# Allegro board SDHCalDIF_old.brd
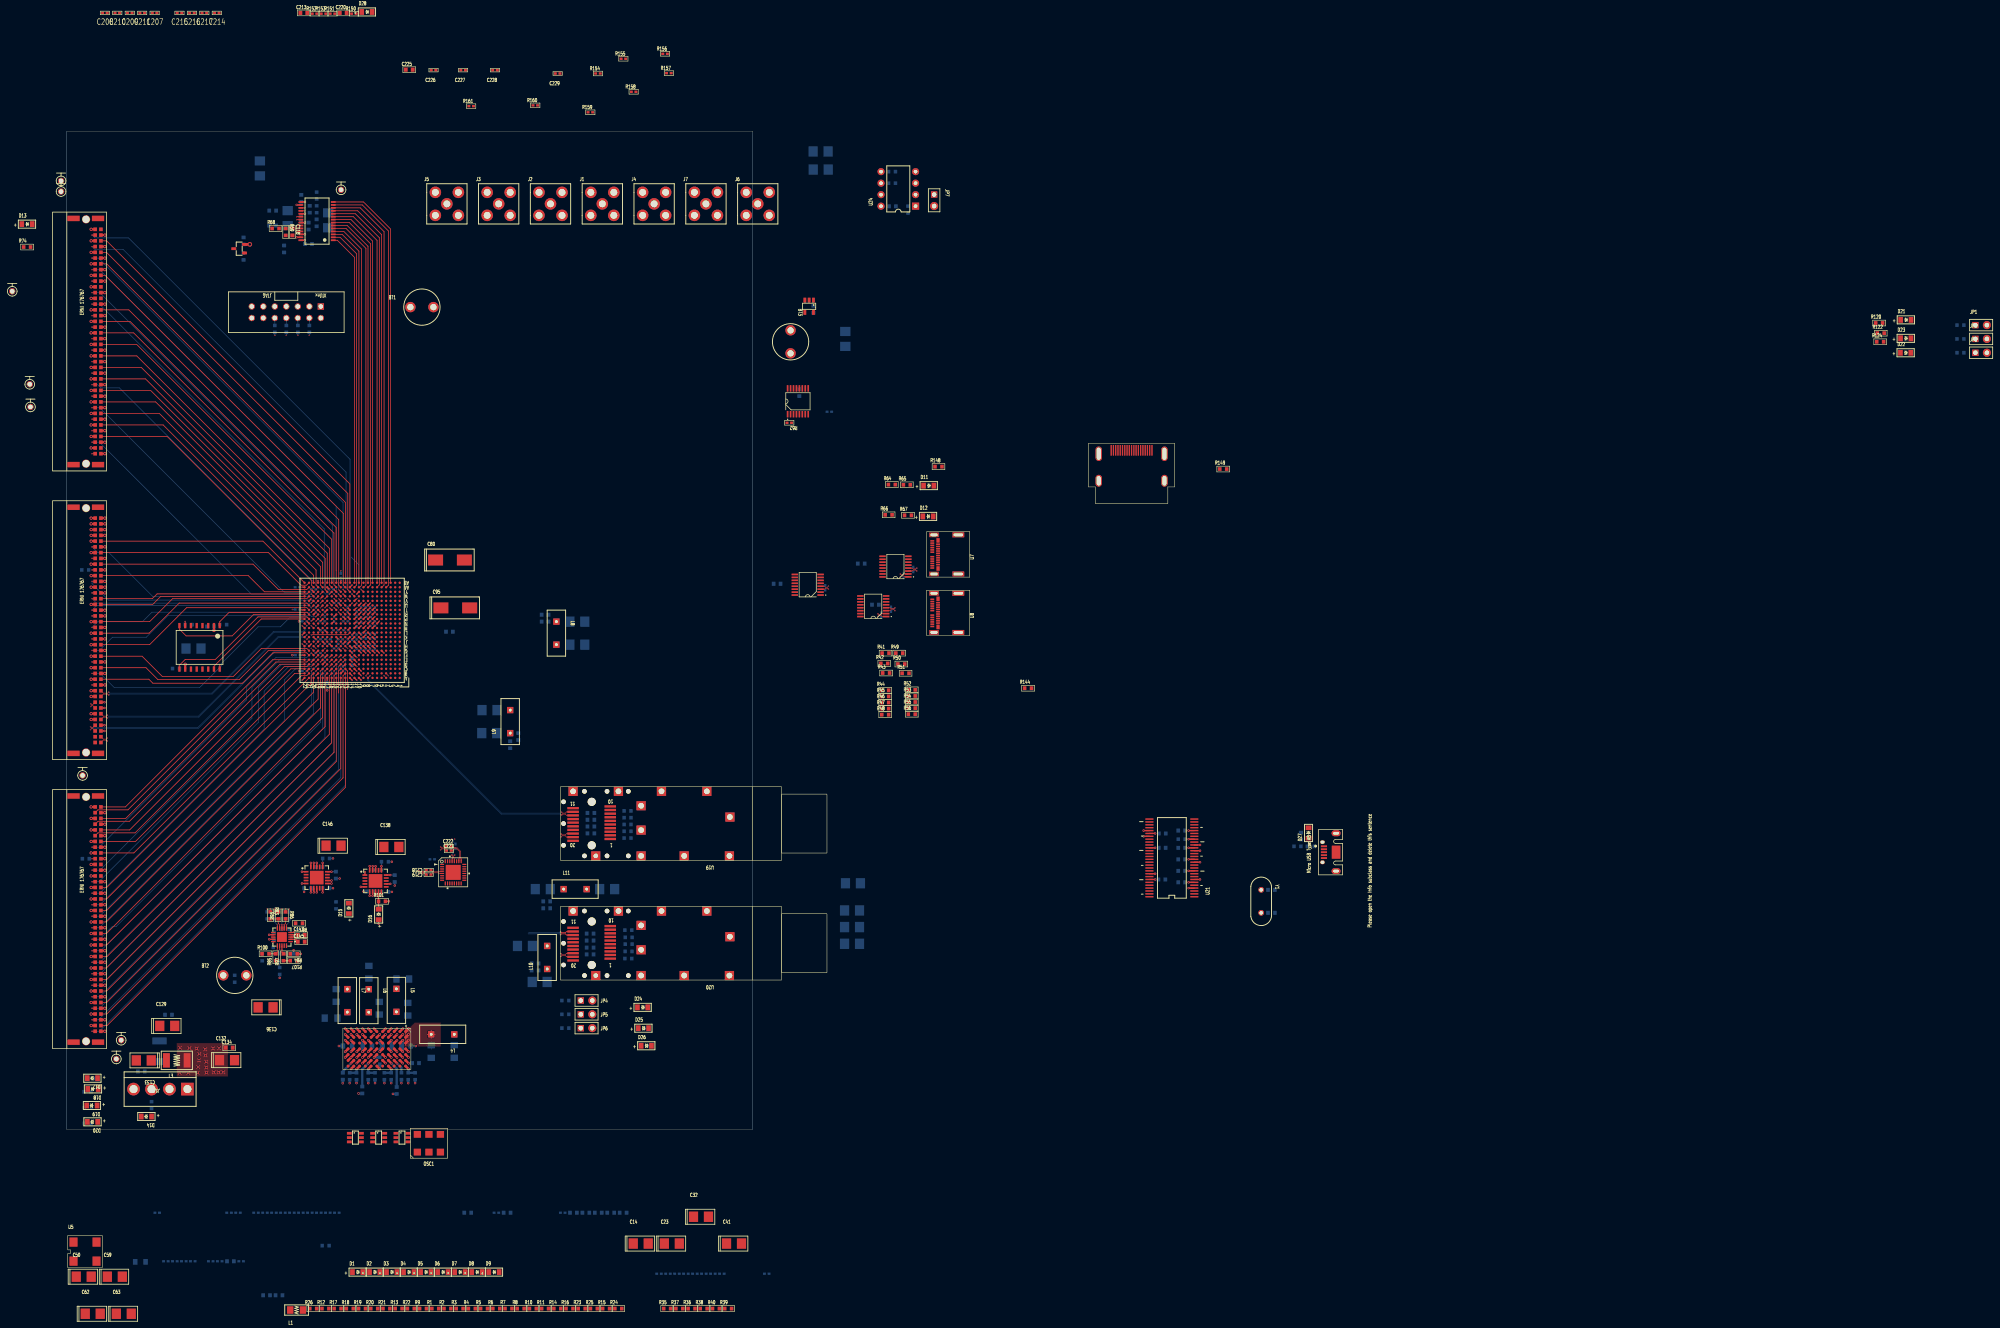
[diagram p0: board, top side]
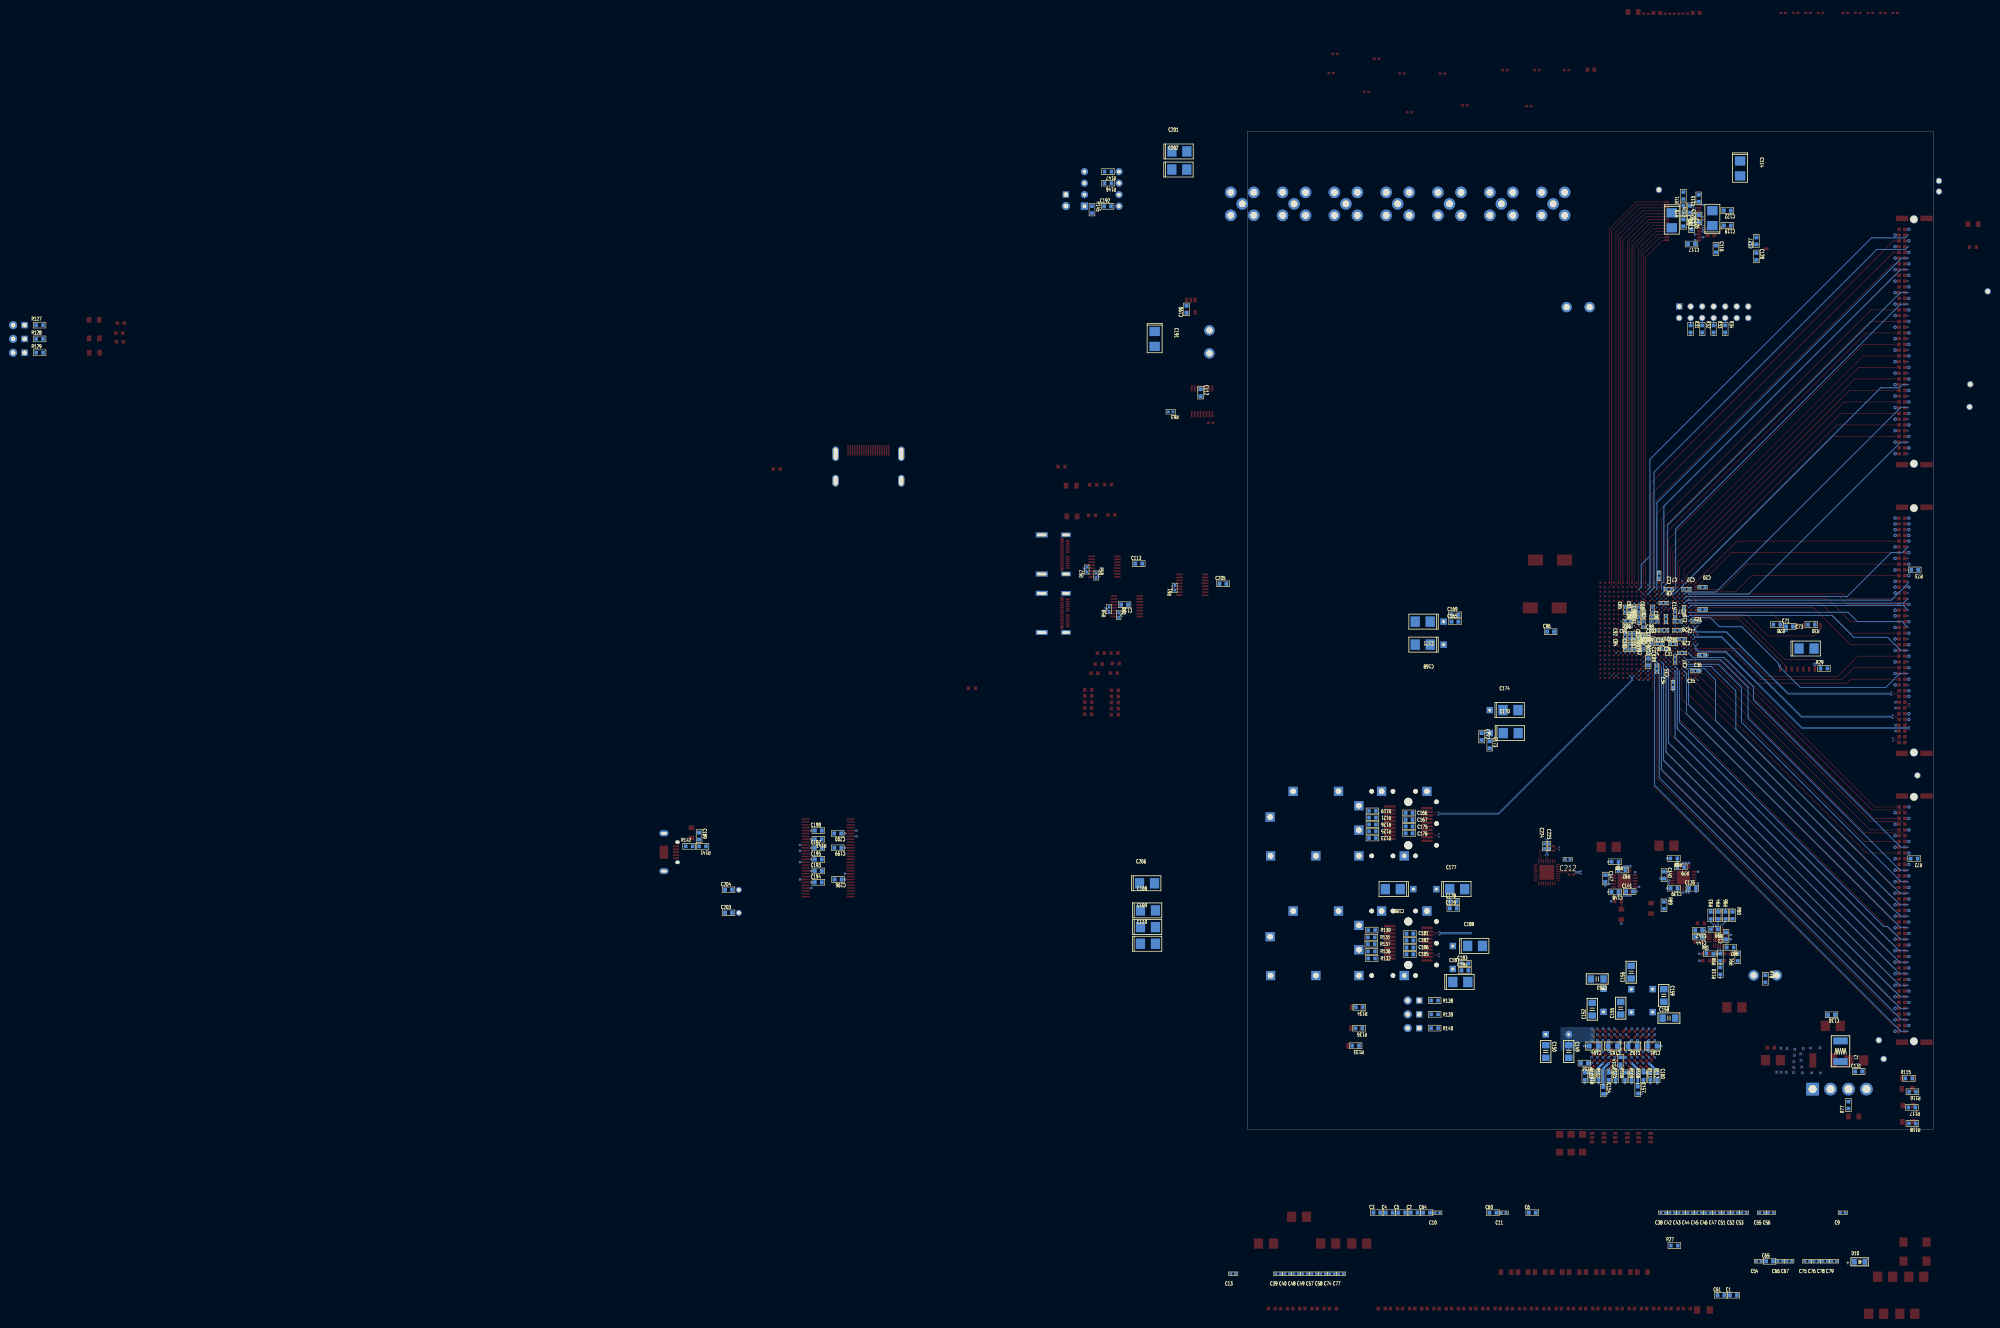
[diagram p1: board, bottom side, seen from below]

Outline 151.28 x 220.4 mm; copper layers: TOP, GND1, POWER1, SIG1, GND2, POWER2, SIG2, POWER3, GND3, BOTTOM. Coordinates in mm from the lower left corner of the outline.
Outline path: 0,220.4 0,0 151.28,0 151.28,220.4 0,220.4

## Design rules (mm)
net group CDRIN: nets CDRINN CDRINP
net group CK_5: nets CK_5N CK_5P
net group CK_40: nets CK_40N CK_40P
net group CLKOUT: nets CDRCLKOUTN CDRCLKOUTP
net group DATAOUT: nets CDRDATAOUTN CDRDATAOUTP
net group DP5: nets XTALIN XTALOUT
net group DTCC_CLK1IN_DIFF: nets DTCC_CLK1IN_N DTCC_CLK1IN_P
net group DTCC_CLK1OUT_DIFF: nets DTCC_CLK1OUT_N DTCC_CLK1OUT_P
net group DTCC_CLK2IN_DIFF: nets DTCC_CLK2IN_N DTCC_CLK2IN_P
net group DTCC_CLK2OUT_DIFF: nets DTCC_CLK2OUT_N DTCC_CLK2OUT_P
net group DTCC_CONTROL1IN_DIFF: nets DTCC_CONTROL1IN_N DTCC_CONTROL1IN_P
net group DTCC_CONTROL2IN_DIFF: nets DTCC_CONTROL2IN_N DTCC_CONTROL2IN_P
net group DTCC_DATA1OUT_DIFF: nets DTCC_DATA1OUT_N DTCC_DATA1OUT_P
net group DTCC_DATA2OUT_DIFF: nets DTCC_DATA2OUT_N DTCC_DATA2OUT_P
net group ELINKCLKIN_DIFF: nets ELINKCLKIN_N ELINKCLKIN_P
net group ELINKDATAIN_DIFF: nets ELINKDATAIN_N ELINKDATAIN_P
net group ELINKDATAOUT_DIFF: nets ELINKDATAOUT_N ELINKDATAOUT_P
net group PLUG1_DATAOUT_DIFF: nets PLUG1_DATAOUT_N PLUG1_DATAOUT_P
net group PLUG2_DATAIN_DIFF: nets PLUG2_DATAIN_N PLUG2_DATAIN_P
net group RAZ_CHN: nets RAZ_CHNN RAZ_CHNP
net group REGULARIO_SFP_RX: nets REGULARIO_SFP_RX+ REGULARIO_SFP_RX-
net group REGULARIO_SFP_TX: nets REGULARIO_SFP_TX+ REGULARIO_SFP_TX-
net group RX_CDR_CLK: nets RX_CDR_CLKN RX_CDR_CLKP
net group RX_CDR_RX: nets RX_CDR_RXN RX_CDR_RXP
net group SFP_CLK: nets SFP_CLK_N SFP_CLK_P
net group SFP_RX: nets SFP_RX+ SFP_RX-
net group SFP_TX: nets SFP_TX+ SFP_TX-
net group SPARE_LVDS: nets SPARE_LVDS_N SPARE_LVDS_P
net group USB_DATA: nets D+ D-
net group VAL_EVT: nets VAL_EVTN VAL_EVTP

## Placement (name value [footprint] x y rotation side)
BT1  Button  [INDC2-200-M]  78.34 181.55 0 top
BT2  Button  [INDC2-200-M]  37.06 34.03 0 top
BT3  Button  [INDC2-200-M]  159.67 173.89 270 top
C1  100n  [SC0603]  44.07 -36.59 180 bottom
C2  100n  [SC0603]  114.5 -18.38 180 bottom
C3  100n  [SC0603]  122.73 -18.38 180 bottom
C4  100n  [SC0603]  119.99 -18.38 180 bottom
C5  100n  [SC0603]  117.25 -18.38 180 bottom
C6  100n  [SC0603]  88.44 -18.38 180 bottom
C7  470n  [SC0402]  58.32 119.27 0 bottom
C8  470n  [SC0402]  59.49 116.22 0 bottom
C9  470n  [SC0402]  19.94 -18.38 180 bottom
C10  470n  [SC0402]  109.4 -18.38 180 bottom
C11  470n  [SC0402]  94.77 -18.38 180 bottom
C12  4.7u  [SC0402]  60.44 122.24 90 bottom
C13  4.7u  [SC0402]  154.41 -31.84 180 bottom
C14  100u  [STC3528]  126.62 -25.18 0 top
C15  470n  [SC0402]  54.95 114.71 270 bottom
C16  470n  [SC0402]  59.33 110.2 180 bottom
C17  470n  [SC0402]  56.39 112.18 0 bottom
C18  470n  [SC0402]  58.97 112.65 270 bottom
C19  470n  [SC0402]  56.93 113.74 90 bottom
C20  470n  [SC0402]  50.88 119.7 0 bottom
C21  4.7u  [SC0402]  50.88 114.8 180 bottom
C22  4.7u  [SC0402]  54.42 119.24 0 bottom
C23  100u  [STC3528]  133.48 -25.18 0 top
C24  470n  [SC0402]  60.38 107.2 180 bottom
C25  470n  [SC0402]  59.46 106.18 0 bottom
C26  470n  [SC0402]  57.66 108.22 180 bottom
C27  470n  [SC0402]  52.43 112.18 180 bottom
C28  470n  [SC0402]  55.47 108.22 0 bottom
C29  470n  [SC0402]  55.42 105.19 0 bottom
C30  4.7u  [SC0402]  56.45 110.2 180 bottom
C31  4.7u  [SC0402]  57.41 107.2 180 bottom
C32  100u  [STC3528]  139.9 -19.27 0 top
C33  470n  [SC0402]  60.95 101.75 90 bottom
C34  470n  [SC0402]  57.43 98.15 270 bottom
C35  470n  [SC0402]  52.45 101.18 180 bottom
C36  470n  [SC0402]  50.95 104.71 180 bottom
C37  470n  [SC0402]  56.93 103.76 90 bottom
C38  470n  [SC0402]  59.56 -18.38 180 bottom
C39  4.7u  [SC0402]  144.51 -31.84 180 bottom
C40  4.7u  [SC0402]  142.53 -31.84 180 bottom
C41  100u  [STC3528]  147.19 -25.18 0 top
C42  470n  [SC0402]  57.58 -18.38 180 bottom
C43  470n  [SC0402]  55.6 -18.38 180 bottom
C44  470n  [SC0402]  53.62 -18.38 180 bottom
C45  470n  [SC0402]  51.64 -18.38 180 bottom
C46  470n  [SC0402]  49.66 -18.38 180 bottom
C47  470n  [SC0402]  47.68 -18.38 180 bottom
C48  4.7u  [SC0402]  140.55 -31.84 180 bottom
C49  4.7u  [SC0402]  138.57 -31.84 180 bottom
C50  100u  [STC3528]  3.73 -32.5 0 top
C51  470n  [SC0402]  45.69 -18.38 180 bottom
C52  470n  [SC0402]  43.71 -18.38 180 bottom
C53  470n  [SC0402]  41.73 -18.38 180 bottom
C54  470n  [SC0402]  38.46 -29.1 180 bottom
C55  470n  [SC0402]  37.77 -18.38 180 bottom
C56  470n  [SC0402]  35.79 -18.38 180 bottom
C57  4.7u  [SC0402]  136.58 -31.84 180 bottom
C58  4.7u  [SC0402]  134.6 -31.84 180 bottom
C59  100u  [STC3528]  10.59 -32.5 0 top
C60  100n  [SC0603]  97.13 -18.38 180 bottom
C61  1u  [SC0603]  46.81 -36.59 180 bottom
C62  10u  [STC3528]  5.71 -40.68 0 top
C63  10u  [STC3528]  12.57 -40.68 0 top
C64  100n  [SC0603]  111.76 -18.38 180 bottom
C65  10n  [SC0603]  36.09 -29.1 180 bottom
C66  100n  [SC0402]  33.73 -29.1 180 bottom
C67  100n  [SC0402]  31.75 -29.1 180 bottom
C68  470n  [SC0402]  61.94 114.78 270 bottom
C69  47u  [SC0603]  62.88 103.23 270 bottom
C70  100n  [SC0402]  65.95 108.86 90 bottom
C71  100n  [SC0603]  31.7 111.04 180 bottom
C72  470n  [SC0402]  64.96 108.86 90 bottom
C73  10u  [STC3528]  27.94 106.17 180 bottom
C74  4.7u  [SC0402]  132.62 -31.84 180 bottom
C75  100n  [SC0402]  27.79 -29.1 180 bottom
C76  100n  [SC0402]  25.81 -29.1 180 bottom
C77  4.7u  [SC0402]  130.64 -31.84 180 bottom
C78  100n  [SC0402]  23.83 -29.1 180 bottom
C79  100n  [SC0402]  21.84 -29.1 180 bottom
C80  300u  [STC7343]  84.53 125.71 0 top
C81  4.7u  [SC0402]  64.95 114.81 270 bottom
C82  4.7u  [SC0402]  66.93 108.86 90 bottom
C83  4.7u  [SC0402]  62.95 108.64 270 bottom
C84  4.7u  [SC0402]  67.93 106.56 270 bottom
C85  4.7u  [SC0402]  66.94 114.77 270 bottom
C86  4.7u  [SC0402]  66.53 113.17 180 bottom
C87  470n  [SC0402]  65.93 114.81 90 bottom
C88  470n  [SC0402]  67.96 114.76 90 bottom
C89  470n  [SC0402]  64.94 112.52 270 bottom
C90  470n  [SC0402]  67.41 112.2 180 bottom
C91  470n  [SC0402]  67.44 111.21 0 bottom
C92  470n  [SC0402]  67.96 108.84 270 bottom
C93  470n  [SC0402]  63.92 111.56 270 bottom
C94  470n  [SC0402]  66.92 106.58 90 bottom
C95  100u  [STC7343]  85.7 115.15 0 top
C96  100u  [SC0603]  84.4 109.89 180 bottom
C97  4.7u  [SC0402]  62.93 105.85 270 bottom
C98  4.7u  [SC0402]  61.53 113.17 180 bottom
C99  4.7u  [SC0402]  61.59 110.21 180 bottom
C100  470n  [SC0402]  63.92 108.71 270 bottom
C101  470n  [SC0402]  60.35 108.19 180 bottom
C102  470n  [SC0402]  61.49 112.18 180 bottom
C103  470n  [SC0402]  63.94 113.82 270 bottom
C104  470n  [SC0402]  61.96 107.75 270 bottom
C105  470n  [SC0402]  65.93 106.58 270 bottom
C106  470n  [SC0402]  64.93 106.58 90 bottom
C107  470n  [SC0402]  63.95 106.63 270 bottom
C108  10u  [STC3528]  173.23 48.36 180 bottom
C109  10u  [STC3528]  173.23 44.68 180 bottom
C110  10u  [STC3528]  173.23 41 180 bottom
C111  100n  [SC0603]  178.38 115.85 0 bottom
C112  100n  [SC0603]  161.59 162.66 270 bottom
C113  100n  [SC0603]  175.26 124.92 180 bottom
C114  10u  [STC3528]  42.6 212.17 270 bottom
C115  100n  [SC0603]  51.71 205.56 90 bottom
C116  100n  [SC0603]  47.93 194.39 270 bottom
C117  100n  [SC0603]  53.31 195.48 0 bottom
C118  100n  [SC0603]  49.76 198.15 270 top
C119  100n  [SC0603]  45.39 199.54 0 bottom
C120  10u  [STC3528]  48.72 201.19 90 bottom
C121  100n  [SC0603]  51.66 201.09 90 bottom
C122  100n  [SC0603]  45.42 202.84 0 bottom
C123  10u  [STC3528]  57.66 200.71 270 bottom
C124  x  [SC0603]  53.59 203.15 90 bottom
C125  100n  [SC0603]  55.12 200.15 270 bottom
C126  100n  [SC0603]  53.34 199.44 270 bottom
C127  100n  [SC0603]  38.99 196.16 90 bottom
C128  470n  [SC0603]  38.99 192.74 270 bottom
C129  10u  [STC3528]  22.15 22.86 0 top
C130  100n  [SC0603]  22.43 25.32 0 bottom
C131  100n  [SC0603]  16.43 12.8 180 bottom
C132  10u  [STC3528]  35.35 15.3 0 top
C133  10u  [STC3528]  16.98 15.25 180 top
C134  100n  [SC0603]  35.83 18.05 0 top
C135  4.7u  [SC0603]  53.11 53.26 180 bottom
C136  10u  [STC3528]  43.85 26.96 180 top
C137  100n  [SC0603]  45.69 42.75 90 bottom
C138  10u  [STC3528]  71.59 62.37 0 top
C139  4.7u  [SC0603]  57.18 53.26 0 bottom
C140  470p  [SC0603]  59.36 56.16 270 bottom
C141  4.7u  [SC0603]  66.98 52.55 180 bottom
C142  22n  [SC0603]  51.71 43.99 0 bottom
C143  22n  [SC0603]  51.71 42.98 0 top
C144  22n  [SC0603]  51.71 42.49 0 bottom
C145  22n  [SC0603]  51.71 41.45 0 top
C146  10u  [STC3528]  58.84 62.65 0 top
C147  1n  [SC0603]  72.34 55.4 270 bottom
C148  4.7u  [SC0603]  70.18 52.45 0 bottom
C149  47uF  [SC1206]  80.39 17.22 270 bottom
C150  47uF  [SC1206]  85.47 17.22 270 bottom
C151  100n  [SC0603]  76.94 14.66 0 bottom
C152  47uF  [SC1206]  75.21 26.54 90 bottom
C153  47uF  [SC1206]  74.12 33.22 0 bottom
C154  100n  [SC0603]  72.77 8.61 270 bottom
C155  47uF  [SC1206]  68.94 26.77 90 bottom
C156  47uF  [SC1206]  66.62 34.72 90 bottom
C157  100n  [SC0603]  65.18 8.71 270 bottom
C158  47uF  [SC1206]  58.29 24.59 180 bottom
C159  47uF  [SC1206]  59.44 29.59 270 bottom
C160  100n  [SC0603]  60.88 11.76 270 bottom
C161  10uF  [SC0805]  61.93 18.43 0 bottom
C162  10uF  [SC0805]  66.29 18.43 0 bottom
C163  10uF  [SC0805]  70.69 18.43 0 bottom
C164  10uF  [SC0805]  74.85 18.43 0 bottom
C165  100n  [SC0603]  105.51 112.11 180 bottom
C166  100n  [SC0603]  115.62 69.88 0 bottom
C167  100n  [SC0603]  115.62 68.37 0 bottom
C168  10u  [STC3528]  112.62 107.04 0 bottom
C169  100n  [SC0603]  105.51 113.63 180 bottom
C170  10u  [STC3528]  93.19 87.5 180 bottom
C171  10u  [STC3528]  112.62 112.11 0 bottom
C172  100n  [SC0603]  99.6 86.74 270 bottom
C173  100n  [SC0603]  97.81 84.94 270 bottom
C174  10u  [STC3528]  93.24 92.58 180 bottom
C175  100n  [SC0603]  115.62 66.89 0 bottom
C176  100n  [SC0603]  115.62 65.37 0 bottom
C177  10u  [STC3528]  105 53.06 180 bottom
C178  100n  [SC0603]  105.87 50.36 180 bottom
C179  100n  [SC0603]  105.87 48.82 180 bottom
C180  10u  [STC3528]  119.2 53.06 0 bottom
C181  100n  [SC0603]  115.44 43.23 0 bottom
C182  100n  [SC0603]  115.44 41.71 0 bottom
C183  100n  [SC0603]  103.3 36.66 180 bottom
C184  100n  [SC0603]  103.3 35.12 180 bottom
C185  100n  [SC0603]  115.44 38.65 0 bottom
C186  100n  [SC0603]  115.44 40.15 0 bottom
C187  10u  [STC3528]  104.32 32.57 180 bottom
C188  10u  [STC3528]  101.07 40.52 180 bottom
C189  100n  [SC0603]  272.26 64.77 270 bottom
C190  100n  [SC0603]  164.71 181.05 90 bottom
C191  10u  [STC3528]  171.75 174.52 270 bottom
C192  100n  [SC0603]  182.14 203.8 180 bottom
C193  100n  [SC0603]  245.95 57.09 180 bottom
C194  100n  [SC0603]  245.95 54.56 180 bottom
C195  100n  [SC0603]  245.95 59.63 180 bottom
C196  100n  [SC0603]  241.58 55.19 0 bottom
C197  100n  [SC0603]  245.95 62.17 180 bottom
C198  100n  [SC0603]  245.95 65.99 180 bottom
C199  100n  [SC0603]  241.66 62.19 0 bottom
C200  100n  [SC0603]  241.68 65.35 0 bottom
C201  10u  [STC3528]  166.29 215.9 180 bottom
C202  10u  [STC3528]  166.32 211.92 180 bottom
C203  12p  [SC0603]  265.76 47.83 180 bottom
C204  12p  [SC0603]  265.76 52.9 180 bottom
C205  100n  [SC0603]  156.69 120.47 180 bottom
C206  10u  [STC3528]  173.43 54.36 180 bottom
C207  100n  [SC0402]  19.37 246.49 0 top
C208  100n  [SC0402]  8.39 246.49 0 top
C209  100n  [SC0402]  13.88 246.49 0 top
C210  100n  [SC0402]  11.14 246.49 0 top
C211  100n  [SC0402]  16.62 246.49 0 top
C212  100n  [SC0402]  80.62 59.64 180 bottom
C213  470n  [SC0603]  52.29 246.49 0 top
C214  100n  [SC0402]  33.08 246.49 0 top
C215  100n  [SC0402]  24.85 246.49 0 top
C216  100n  [SC0402]  27.6 246.49 0 top
C217  100n  [SC0402]  30.34 246.49 0 top
C218  100n  [SC0402]  79.82 57.28 180 top
C219  100n  [SC0402]  79.82 56.26 180 top
C220  100n  [SC0603]  60.97 246.49 0 top
C221  100n  [SC0402]  84.29 61.56 0 top
C222  100n  [SC0402]  84.29 62.55 0 top
C223  100n  [SC0402]  84.73 62.53 270 bottom
C224  100n  [SC0402]  85.75 62.51 270 bottom
C225  100n  [SC0603]  75.54 233.96 0 top
C226  100n  [SC0402]  80.9 233.86 0 top
C227  100n  [SC0402]  87.43 233.86 0 top
C228  100n  [SC0402]  94.46 233.86 0 top
C229  100n  [SC0402]  108.28 233.12 0 top
D1  Green  [SD0805]  64.16 -31.48 0 top
D2  Green  [SD0805]  67.92 -31.48 0 top
D3  Green  [SD0805]  71.68 -31.48 0 top
D4  Green  [SD0805]  75.44 -31.48 0 top
D5  Green  [SD0805]  79.2 -31.48 0 top
D6  Green  [SD0805]  82.96 -31.48 0 top
D7  Green  [SD0805]  86.72 -31.48 0 top
D8  Green  [SD0805]  90.47 -31.48 0 top
D9  Green  [SD0805]  94.23 -31.48 0 top
D10  Red  [SD0805]  16.23 -29.22 180 bottom
D11  LED  [SD0805]  190.14 142.13 0 top
D12  LED  [SD0805]  189.99 135.35 0 top
D13  Green  [SD0805]  -8.79 199.86 0 top
D14  Green  [SD0805]  17.55 2.86 180 top
D15  Green  [SD0805]  62.22 48.82 90 top
D16  Green  [SD0805]  68.8 47.47 90 top
D17  Green  [SD0805]  5.64 11.32 180 top
D18  Green  [SD0805]  5.77 8.95 180 top
D19  Green  [SD0805]  5.54 5.3 180 top
D20  Green  [SD0805]  5.67 1.69 180 top
D21  Red  [SD0805]  405.71 178.73 0 top
D22  Red  [SD0805]  405.66 171.47 0 top
D23  Green  [SD0805]  405.69 174.66 0 top
D24  Red  [SD0805]  127.03 26.97 0 top
D25  Green  [SD0805]  127.2 22.36 0 top
D26  Red  [SD0805]  127.84 18.48 0 top
D27  Green  [SD0805]  273.94 65.46 90 top
D28  Red  [SD0805]  66.21 246.71 0 top
J1  LEMO  [CON-BNC-S-T]  118.14 204.34 0 top
J2  LEMO  [CON-BNC-S-T]  106.71 204.34 0 top
J3  LEMO  [CON-BNC-S-T]  95.28 204.34 0 top
J4  LEMO  [CON-BNC-S-T]  129.57 204.34 0 top
J5  LEMO  [CON-BNC-S-T]  83.85 204.34 0 top
J6  LEMO  [CON-BNC-S-T]  152.43 204.34 0 top
J7  LEMO  [CON-BNC-S-T]  141 204.34 0 top
J8  JTAG-14pin  [JTAG-14P]  61.17 184.91 180 top
J9  HDMI_A  [HDMR-19-02-X-TH]  234.9 138.71 0 top
J10  CONN  [ERNI154767MALECONNECTOR]  6.25 21.68 180 top
J11  CONN  [ERNI154767MALECONNECTOR]  6.25 85.43 180 top
J12  CONN  [ERNI154767MALECONNECTOR]  6.25 149.19 180 top
J13  DC Jack  [SIP-4P-156]  20.66 8.92 180 top
JP1  Jump wire  [SIP-2P]  422.33 177.57 0 top
JP2  Jump wire  [SIP-2P]  422.33 174.52 0 top
JP3  Jump wire  [SIP-2P]  422.33 171.48 0 top
JP4  Jump wire  [SIP-2P]  114.66 28.47 0 top
JP5  Jump wire  [SIP-2P]  114.66 25.43 0 top
JP6  Jump wire  [SIP-2P]  114.66 22.38 0 top
JP7  Jump wire  [SIP-2P]  191.34 205.13 270 top
L1  bead  [SL1206]  50.69 -39.86 0 top
L2  10uH  [SL1812]  20.45 17.27 90 bottom
L3  10uH  [SL1812]  24.26 15.26 0 top
L4  Magbead  [BL02RN2R1M2B]  82.93 21.01 180 top
L5  Magbead  [BL02RN2R1M2B]  72.71 28.51 270 top
L6  Magbead  [BL02RN2R1M2B]  66.62 28.43 270 top
L7  Magbead  [BL02RN2R1M2B]  61.88 28.45 270 top
L8  1uH  [BL02RN2R1M2B]  108.01 109.58 270 top
L9  1uH  [BL02RN2R1M2B]  97.81 90.04 90 top
L10  1uH  [BL02RN2R1M2B]  105.96 37.97 90 top
L11  1uH  [BL02RN2R1M2B]  112.14 53.07 0 top
NOREF  -  []  279.47 63.56 0 top
NOREF#2  -  []  0 0 90 top
NOREF#3  -  []  0 220.4 0 top
NOREF#4  -  []  279.47 58.82 0 top
OSC1  SiT9102AI-283N25E125.000  [XO75L]  79.88 -3.04 0 top
R1  1k  [SR0603]  81.28 -39.54 0 top
R2  1k  [SR0603]  83.97 -39.54 0 top
R3  1k  [SR0603]  86.66 -39.54 0 top
R4  1k  [SR0603]  89.36 -39.54 0 top
R5  1k  [SR0603]  92.05 -39.54 0 top
R6  1k  [SR0603]  94.74 -39.54 0 top
R7  1k  [SR0603]  97.43 -39.54 0 top
R8  1k  [SR0603]  100.13 -39.54 0 top
R9  x  [SR0603]  78.59 -39.54 0 top
R10  0  [SR0603]  102.82 -39.54 0 top
R11  0  [SR0603]  105.51 -39.54 0 top
R12  50  [SR0603]  57.05 -39.54 0 top
R13  x  [SR0603]  73.2 -39.54 0 top
R14  0  [SR0603]  108.2 -39.54 0 top
R15  10k  [SR0603]  118.97 -39.54 0 top
R16  0  [SR0603]  110.9 -39.54 0 top
R17  50  [SR0603]  59.74 -39.54 0 top
R18  50  [SR0603]  62.43 -39.54 0 top
R19  50  [SR0603]  65.13 -39.54 0 top
R20  50  [SR0603]  67.82 -39.54 0 top
R21  50  [SR0603]  70.51 -39.54 0 top
R22  x  [SR0603]  75.9 -39.54 0 top
R23  0  [SR0603]  113.59 -39.54 0 top
R24  10k  [SR0603]  121.67 -39.54 0 top
R25  0  [SR0603]  116.28 -39.54 0 top
R26  50  [SR0603]  54.36 -39.54 0 top
R27  33  [SR0603]  57.1 -25.64 180 bottom
R28  4.7k  [SR0603]  34.49 111.45 0 bottom
R29  4.7k  [SR0603]  24.08 101.76 180 bottom
R30  4.7k  [SR0603]  26.87 111.45 0 bottom
R31  33  [SR0603]  53.51 176.73 270 bottom
R32  33  [SR0603]  50.97 176.73 270 bottom
R33  33  [SR0603]  48.43 176.73 270 bottom
R34  33  [SR0603]  45.89 176.73 270 bottom
R35  4.7k  [SR0603]  132.44 -39.54 0 top
R36  300  [SR0603]  137.82 -39.54 0 top
R37  4.7k  [SR0603]  135.13 -39.54 0 top
R38  300  [SR0603]  140.51 -39.54 0 top
R39  220  [SR0603]  145.9 -39.54 0 top
R40  100  [SR0603]  143.21 -39.54 0 top
R41  x  [SR0603]  180.62 105.16 0 top
R42  x  [SR0603]  180.34 102.87 0 top
R43  x  [SR0603]  180.75 100.77 0 top
R44  x  [SR0603]  180.54 96.96 0 top
R45  x  [SR0603]  180.54 95.61 0 top
R46  x  [SR0603]  180.54 94.26 0 top
R47  x  [SR0603]  180.54 92.92 0 top
R48  x  [SR0603]  180.54 91.57 0 top
R49  x  [SR0603]  183.64 105.16 0 top
R50  x  [SR0603]  184.1 102.75 0 top
R51  x  [SR0603]  185.04 100.72 0 top
R52  x  [SR0603]  186.41 97.06 0 top
R53  x  [SR0603]  186.41 95.71 0 top
R54  x  [SR0603]  186.41 94.37 0 top
R55  x  [SR0603]  186.41 93.02 0 top
R56  x  [SR0603]  186.41 91.67 0 top
R57  100  [SR0402]  186.74 123.62 90 bottom
R58  100  [SR0402]  184.65 122.3 270 bottom
R59  100  [SR0402]  181.82 114.86 90 bottom
R60  100  [SR0402]  179.7 113.56 270 bottom
R61  100  [SR0402]  167.31 119.58 90 bottom
R62  100  [SR0402]  159.38 156.01 180 top
R63  100  [SR0402]  168.22 158.45 0 bottom
R64  x  [SR0603]  182.02 142.37 0 top
R65  10k  [SR0603]  185.32 142.32 0 top
R66  x  [SR0603]  181.31 135.69 0 top
R67  10k  [SR0603]  185.57 135.59 0 top
R68  x  [SR0603]  46.05 198.91 0 top
R69  x  [SR0603]  48.29 198.15 270 top
R70  x  [SR0603]  55.12 203.15 90 bottom
R71  x  [SR0603]  55.12 206.17 90 bottom
R72  0  [SR0603]  4.19 59.77 0 bottom
R73  0  [SR0603]  4.06 123.53 0 bottom
R74  1.5k  [SR0603]  -8.76 194.8 0 top
R77  1.5k  [SR0603]  18.69 5.38 90 bottom
R78  100k  [SR0603]  37.03 33.27 270 bottom
R79  1.5k  [SR0603]  55.68 57.96 0 bottom
R80  68k  [SR0603]  44.22 47.27 270 bottom
R81  100k  [SR0603]  49.28 38.79 180 bottom
R82  100k  [SR0603]  44.78 40.21 0 bottom
R83  33k  [SR0603]  44.91 47.27 270 top
R84  100k  [SR0603]  50.07 38.77 180 top
R85  100k  [SR0603]  46.1 38.02 90 top
R86  13k  [SR0603]  48.26 47.27 270 top
R87  33k  [SR0603]  51.24 45.53 180 top
R88  6.04k  [SR0603]  57.2 59.84 0 bottom
R89  100k  [SR0603]  59.39 49.48 270 bottom
R90  4.02k  [SR0603]  48.26 44.2 0 bottom
R91  x  [SR0603]  43.1 38 90 bottom
R92  3k  [SR0603]  68.66 57.28 0 bottom
R93  6.04k  [SR0603]  49.07 47.24 90 bottom
R94  10k  [SR0603]  47.45 47.27 90 bottom
R95  20k  [SR0603]  46.63 47.27 90 top
R96  10k  [SR0603]  45.8 47.27 90 bottom
R97  0  [SR0603]  47.8 38.02 90 top
R98  6.04k  [SR0603]  70.18 59.11 0 bottom
R99  0  [SR0603]  46.96 38.02 90 bottom
R100  0  [SR0603]  43.84 38.78 0 top
R101  100k  [SR0603]  69.53 50.37 0 top
R102  40.2k  [SR0603]  75.31 11.76 270 bottom
R103  60.2k  [SR0603]  76.83 11.76 270 bottom
R104  0  [SR0603]  73.81 11.77 90 bottom
R105  40.2k  [SR0603]  71.55 11.76 270 bottom
R106  20k  [SR0603]  70.05 11.76 270 bottom
R107  x  [SR0603]  50.06 37.26 180 top
R108  68k  [SR0603]  66.5 11.76 270 bottom
R109  15k  [SR0603]  68 11.76 270 bottom
R110  x  [SR0603]  46.96 35 90 bottom
R111  68k  [SR0603]  63.91 11.76 270 bottom
R112  21k  [SR0603]  62.41 11.76 270 bottom
R114  0  [SR0603]  69.04 15.19 90 bottom
R115  10k  [SR0603]  5.36 11.28 180 bottom
R116  10k  [SR0603]  4.57 8.33 0 bottom
R117  10k  [SR0603]  4.7 4.88 0 bottom
R118  10k  [SR0603]  4.6 1.32 0 bottom
R119  4.7k  [SR0603]  123.7 70.33 0 bottom
R120  300  [SR0603]  399.82 178.03 0 top
R121  4.7k  [SR0603]  123.7 68.83 0 bottom
R122  300  [SR0603]  400.18 175.8 0 top
R123  4.7k  [SR0603]  123.7 64.33 0 bottom
R124  300  [SR0603]  400.05 173.89 0 top
R125  4.7k  [SR0603]  123.7 65.83 0 bottom
R126  4.7k  [SR0603]  123.7 67.33 0 bottom
R127  4.7k  [SR0603]  417.75 177.57 180 bottom
R128  4.7k  [SR0603]  417.75 174.52 180 bottom
R129  4.7k  [SR0603]  417.75 171.48 180 bottom
R130  4.7k  [SR0603]  123.88 44.01 0 bottom
R131  4.7k  [SR0603]  123.95 42.41 0 bottom
R132  4.7k  [SR0603]  123.88 37.74 0 bottom
R133  300  [SR0603]  127.41 18.49 0 bottom
R134  300  [SR0603]  126.59 26.97 0 bottom
R135  300  [SR0603]  126.67 22.35 0 bottom
R136  4.7k  [SR0603]  123.93 39.32 0 bottom
R137  4.7k  [SR0603]  123.95 40.92 0 bottom
R138  4.7k  [SR0603]  109.98 28.47 180 bottom
R139  4.7k  [SR0603]  109.98 25.43 180 bottom
R140  4.7k  [SR0603]  109.98 22.38 180 bottom
R141  60k  [SR0603]  271.5 62.51 0 bottom
R142  30k  [SR0603]  274.45 62.51 180 bottom
R143  10k  [SR0603]  245.95 64.08 0 bottom
R144  1M  [SR0603]  212.07 97.41 0 top
R145  10k  [SR0603]  185.57 203.07 270 bottom
R146  2.2k  [SR0603]  182.04 208.91 0 bottom
R147  2.2k  [SR0603]  182.04 211.46 0 bottom
R148  1M  [SR0603]  192.3 146.33 0 top
R149  1M  [SR0603]  255.12 145.8 0 top
R150  0  [SR0402]  63.33 246.33 0 top
R151  1k  [SR0402]  58.61 246.33 0 top
R152  1k  [SR0402]  54.65 246.33 0 top
R153  1k  [SR0402]  56.63 246.33 0 top
R154  220  [SR0402]  117.17 233.12 0 top
R155  47  [SR0402]  122.78 236.37 0 top
R156  15  [SR0402]  131.98 237.46 0 top
R157  220  [SR0402]  132.82 233.2 0 top
R158  47  [SR0402]  125.04 229.08 0 top
R159  15  [SR0402]  115.49 224.56 0 top
R160  100  [SR0402]  103.35 226.09 0 top
R161  100  [SR0402]  89.2 225.91 0 top
TP1  ADC_OTR  [TP_40MIL]  60.5 207.44 0 top
TP2  OutTrig2b  [TP_40MIL]  -12.04 185.04 0 top
TP3  OutTrig1b  [TP_40MIL]  -8.03 159.51 0 top
TP4  OutTrig0b  [TP_40MIL]  -8.18 164.52 0 top
TP5  StartAcq_A  [TP_40MIL]  -1.28 209.41 0 top
TP6  StartAcq_B  [TP_40MIL]  -1.28 207.06 0 top
TP7  StartAcq_C  [TP_40MIL]  3.47 78.16 0 top
TP8  StartAcq_D  [TP_40MIL]  10.92 15.57 0 top
TP9  StartAcq_E  [TP_40MIL]  11.99 19.71 0 top
U1  SN74LVC1T45  [SN74LVC1T45-DBV]  68 -3.24 0 top
U2  SN74LVC1T45  [SN74LVC1T45-DBV]  73.14 -3.24 0 top
U3  SN74LVC1T45  [SN74LVC1T45-DBV]  62.86 -3.24 0 top
U4  XC7A100TFGG484  [ARTIX-7-FGG484]  74.44 121.7 180 top
U5  Oscillater 40M  [OSC4-0705]  4.01 -26.96 0 top
U6  N25Q128  [N25Q128-SF]  24.13 110.18 270 top
U7  USBTypeCPlug  [USB_TYPEC_PLUG_V1]  192.2 126.95 90 top
U8  USBTypeCPlug  [USB_TYPEC_PLUG_V1]  192.2 114.05 90 top
U9  -  [DS90LV049]  182.8 124.26 180 top
U10  -  [DS90LV049]  177.9 115.51 180 top
U11  -  [DS90LV049]  163.45 120.25 180 top
U12  -  [DS90LV049]  161.29 160.76 90 top
U13  AD9220  [AD9220-SSOP]  57.85 205.63 180 top
U14  REF3025  [REF3025-SOT-23-3]  39.2 193.5 90 top
U15  TPS74401  [QFN65P500X500-21]  55.13 55.61 0 top
U16  TPS386000  [TPS386000-VQFN]  49.45 44.48 180 top
U17  TPS74401  [QFN65P500X500-21]  68.11 54.87 0 top
U18  LTM4644-1  [LTM4644_1]  68.4 17.81 180 top
U19  74441-0010  [LASER22-4816-M]  119.89 64.13 180 top
U20  74441-0010  [LASER22-4816-M]  119.89 37.71 180 top
U21  CY7C68013A  [SOP56-25-300]  243.79 59.96 90 top
U22  Molex47590-0001  [MICROUSBMOLEX47590_0001]  281.47 61.21 90 top
U23  TPS3820-33  [TPS3820-33-SOT23]  165.22 182.53 180 top
U24  24LC64  [DIP8-100-300]  183.43 207.65 90 top
U25  ADN2815  [USB3320_QFN32]  85.24 56.77 0 top
Y1  24MHz  [XTAL2-200A]  263.49 50.37 270 top

## Library data of the parts
BT1-BT3 = Button
C1-C13 C15-C22 C24-C31 C33-C40 C42-C49 C51-C58 C60 C61 C64-C72 C74-C79 C81-C94 C96-C107 C111-C113 C115-C119 C121 C122 C124-C128 C130 C131 C134 C135 C137 C139-C145 C147 C148 C165-C167 C169 C172 C173 C175 C176 C178 C179 C181-C186 C190 C192-C200 C203-C205 C225-C229 = Capacitor np
C14 C23 C32 C41 C50 C59 C62 C63 C73 C80 C95 C108-C110 C114 C120 C123 C129 C132 C133 C136 C138 C146 C168 C170 C171 C174 C177 C180 C187 C188 C191 C206 = Capacitor pol
C149 C150 C152 C153 C155 C156 C158 C159 C161-C164 C189 = CAP NP
C151 C154 C157 C160 = CAP NP_0
C201 C202 = CAP POL
C207-C224 = C NP
D1-D28 = LED
J1-J7 = LEMO
J8 = JTAG-14pin
J9 = HDMI_A_0
J10-J12 = CONN_1
J13 = 4 HEADER
JP1-JP7 = Jump wire
L1-L3 L8-L11 = Inductor
L4-L7 = INDUCTOR_1
OSC1 = SiT9102
R1-R26 R28-R56 R64-R71 R74 R77 R79-R96 R98 R101 R115-R140 R143 R145-R147 = Resistor
R27 R78 R97 R99 R100 = R
R57-R63 R141 R142 R144 R148-R161 = RESISTOR
R72 R73 = R: signal model: DEFAULT_RESISTOR_100.000000OHM_1_2
R102-R112 R114 = R_0603
TP1-TP9 = T POINT A
U1-U3 = SN74LVC1T45
U4 = XC7A100TFGG484
U5 = Oscillator_1
U6 = N25Q128
U7 U8 = USBTypeCPlug_0
U9-U12 = DS90LV049
U13 = AD9220
U14 = REF3025
U15 U17 = TPS74401
U16 = TPS386000
U18 = LTM4644-1_1
U19 U20 = 74441-0010
U21 = CY7C68013A_0
U22 = MicroUsbMolex47590-0001
U23 = TPS3820-33
U24 = 24LC64
U25 = ADN2815
Y1 = Crystal

## Footprints (pads in the part's own frame, mm; a bottom-side part is the same pattern mirrored in y, then rotated)
AD9220-SSOP
  rect 1.05x0.38 smd: 1(-0.925,9.325) 2(-0.925,8.675) 3(-0.925,8.025) 4(-0.925,7.375) 5(-0.925,6.725) 6(-0.925,6.075) 7(-0.925,5.425) 8(-0.925,4.775) 9(-0.925,4.125) 10(-0.925,3.475) 11(-0.925,2.825) 12(-0.925,2.175) 13(-0.925,1.525) 14(-0.925,0.875) 15(6.225,0.875) 16(6.225,1.525) 17(6.225,2.175) 18(6.225,2.825) 19(6.225,3.475) 20(6.225,4.125) 21(6.225,4.775) 22(6.225,5.425) 23(6.225,6.075) 24(6.225,6.725) 25(6.225,7.375) 26(6.225,8.025) 27(6.225,8.675) 28(6.225,9.325)
ARTIX-7-FGG484
  round 0.508 smd: A1(1,22) A2(2,22) A3(3,22) A4(4,22) A5(5,22) A6(6,22) A7(7,22) A8(8,22) A9(9,22) A10(10,22) A11(11,22) A12(12,22) A13(13,22) A14(14,22) A15(15,22) A16(16,22) A17(17,22) A18(18,22) A19(19,22) A20(20,22) A21(21,22) A22(22,22) AA1(1,2) AA2(2,2) AA3(3,2) AA4(4,2) AA5(5,2) AA6(6,2) AA7(7,2) AA8(8,2) AA9(9,2) AA10(10,2) AA11(11,2) AA12(12,2) AA13(13,2) AA14(14,2) AA15(15,2) AA16(16,2) AA17(17,2) AA18(18,2) AA19(19,2) AA20(20,2) AA21(21,2) AA22(22,2) AB1(1,1) AB2(2,1) AB3(3,1) AB4(4,1) AB5(5,1) AB6(6,1) AB7(7,1) AB8(8,1) AB9(9,1) AB10(10,1) AB11(11,1) AB12(12,1) AB13(13,1) AB14(14,1) AB15(15,1) AB16(16,1) AB17(17,1) AB18(18,1) AB19(19,1) AB20(20,1) AB21(21,1) AB22(22,1) B1(1,21) B2(2,21) B3(3,21) B4(4,21) B5(5,21) B6(6,21) B7(7,21) B8(8,21) B9(9,21) B10(10,21) B11(11,21) B12(12,21) B13(13,21) B14(14,21) B15(15,21) B16(16,21) B17(17,21) B18(18,21) B19(19,21) B20(20,21) B21(21,21) B22(22,21) C1(1,20) C2(2,20) C3(3,20) C4(4,20) C5(5,20) C6(6,20) C7(7,20) C8(8,20) C9(9,20) C10(10,20) C11(11,20) C12(12,20) C13(13,20) C14(14,20) C15(15,20) C16(16,20) C17(17,20) C18(18,20) C19(19,20) C20(20,20) C21(21,20) C22(22,20) D1(1,19) D2(2,19) D3(3,19) D4(4,19) D5(5,19) D6(6,19) D7(7,19) D8(8,19) D9(9,19) D10(10,19) D11(11,19) D12(12,19) D13(13,19) D14(14,19) D15(15,19) D16(16,19) D17(17,19) D18(18,19) D19(19,19) D20(20,19) D21(21,19) D22(22,19) E1(1,18) E2(2,18) E3(3,18) E4(4,18) E5(5,18) E6(6,18) E7(7,18) E8(8,18) E9(9,18) E10(10,18) E11(11,18) E12(12,18) E13(13,18) E14(14,18) E15(15,18) E16(16,18) E17(17,18) E18(18,18) E19(19,18) E20(20,18) E21(21,18) E22(22,18) F1(1,17) F2(2,17) F3(3,17) F4(4,17) F5(5,17) F6(6,17) F7(7,17) F8(8,17) F9(9,17) F10(10,17) F11(11,17) F12(12,17) F13(13,17) F14(14,17) F15(15,17) F16(16,17) F17(17,17) F18(18,17) F19(19,17) F20(20,17) F21(21,17) F22(22,17) G1(1,16) G2(2,16) G3(3,16) G4(4,16) G5(5,16) G6(6,16) G7(7,16) G8(8,16) G9(9,16) G10(10,16) G11(11,16) G12(12,16) G13(13,16) G14(14,16) G15(15,16) G16(16,16) G17(17,16) G18(18,16) G19(19,16) G20(20,16) G21(21,16) G22(22,16) H1(1,15) H2(2,15) H3(3,15) H4(4,15) H5(5,15) H6(6,15) H7(7,15) H8(8,15) H9(9,15) H10(10,15) H11(11,15) H12(12,15) H13(13,15) H14(14,15) H15(15,15) H16(16,15) H17(17,15) H18(18,15) H19(19,15) H20(20,15) H21(21,15) H22(22,15) J1(1,14) J2(2,14) J3(3,14) J4(4,14) J5(5,14) J6(6,14) J7(7,14) J8(8,14) J9(9,14) J10(10,14) J11(11,14) J12(12,14) J13(13,14) J14(14,14) J15(15,14) J16(16,14) J17(17,14) J18(18,14) J19(19,14) J20(20,14) J21(21,14) J22(22,14) K1(1,13) K2(2,13) K3(3,13) K4(4,13) K5(5,13) K6(6,13) K7(7,13) K8(8,13) K9(9,13) K10(10,13) K11(11,13) K12(12,13) K13(13,13) K14(14,13) K15(15,13) K16(16,13) K17(17,13) K18(18,13) K19(19,13) K20(20,13) K21(21,13) K22(22,13) L1(1,12) L2(2,12) L3(3,12) L4(4,12) L5(5,12) L6(6,12) L7(7,12) L8(8,12) L9(9,12) L10(10,12) L11(11,12) L12(12,12) L13(13,12) L14(14,12) L15(15,12) L16(16,12) L17(17,12) L18(18,12) L19(19,12) L20(20,12) L21(21,12) L22(22,12) M1(1,11) M2(2,11) M3(3,11) M4(4,11) M5(5,11) M6(6,11) M7(7,11) M8(8,11) M9(9,11) M10(10,11) M11(11,11) M12(12,11) M13(13,11) M14(14,11) M15(15,11) M16(16,11) M17(17,11) M18(18,11) M19(19,11) M20(20,11) M21(21,11) M22(22,11) N1(1,10) N2(2,10) N3(3,10) N4(4,10) N5(5,10) N6(6,10) N7(7,10) N8(8,10) N9(9,10) N10(10,10) N11(11,10) N12(12,10) N13(13,10) N14(14,10) N15(15,10) N16(16,10) N17(17,10) N18(18,10) N19(19,10) N20(20,10) N21(21,10) N22(22,10) P1(1,9) P2(2,9) P3(3,9) P4(4,9) P5(5,9) P6(6,9) P7(7,9) P8(8,9) P9(9,9) P10(10,9) P11(11,9) P12(12,9) P13(13,9) P14(14,9) P15(15,9) P16(16,9) P17(17,9) P18(18,9) P19(19,9) P20(20,9) P21(21,9) P22(22,9) R1(1,8) R2(2,8) R3(3,8) R4(4,8) R5(5,8) R6(6,8) R7(7,8) R8(8,8) R9(9,8) R10(10,8) R11(11,8) R12(12,8) R13(13,8) R14(14,8) R15(15,8) R16(16,8) R17(17,8) R18(18,8) R19(19,8) R20(20,8) R21(21,8) R22(22,8) T1(1,7) T2(2,7) T3(3,7) T4(4,7) T5(5,7) T6(6,7) T7(7,7) T8(8,7) T9(9,7) T10(10,7) T11(11,7) T12(12,7) T13(13,7) T14(14,7) T15(15,7) T16(16,7) T17(17,7) T18(18,7) T19(19,7) T20(20,7) T21(21,7) T22(22,7) U1(1,6) U2(2,6) U3(3,6) U4(4,6) U5(5,6) U6(6,6) U7(7,6) U8(8,6) U9(9,6) U10(10,6) U11(11,6) U12(12,6) U13(13,6) U14(14,6) U15(15,6) U16(16,6) U17(17,6) U18(18,6) U19(19,6) U20(20,6) U21(21,6) U22(22,6) V1(1,5) V2(2,5) V3(3,5) V4(4,5) V5(5,5) V6(6,5) V7(7,5) V8(8,5) V9(9,5) V10(10,5) V11(11,5) V12(12,5) V13(13,5) V14(14,5) V15(15,5) V16(16,5) V17(17,5) V18(18,5) V19(19,5) V20(20,5) V21(21,5) V22(22,5) W1(1,4) W2(2,4) W3(3,4) W4(4,4) W5(5,4) W6(6,4) W7(7,4) W8(8,4) W9(9,4) W10(10,4) W11(11,4) W12(12,4) W13(13,4) W14(14,4) W15(15,4) W16(16,4) W17(17,4) W18(18,4) W19(19,4) W20(20,4) W21(21,4) W22(22,4) Y1(1,3) Y2(2,3) Y3(3,3) Y4(4,3) Y5(5,3) Y6(6,3) Y7(7,3) Y8(8,3) Y9(9,3) Y10(10,3) Y11(11,3) Y12(12,3) Y13(13,3) Y14(14,3) Y15(15,3) Y16(16,3) Y17(17,3) Y18(18,3) Y19(19,3) Y20(20,3) Y21(21,3) Y22(22,3)
BL02RN2R1M2B
  rect 1.397x1.397 hole 0.635: 1(-2.54,0) 2(2.54,0)
CON-BNC-S-T
  round 2.54 hole 1.524: 1(0,0) 2(2.54,-2.54) 3(2.54,2.54) 4(-2.54,2.54) 5(-2.54,-2.54)
DIP8-100-300
  rect 1.575x1.575 hole 0.813: 1(-3.81,-3.81)
  round 1.575 hole 0.813: 2(-1.27,-3.81) 3(1.27,-3.81) 4(3.81,-3.81) 5(3.81,3.81) 6(1.27,3.81) 7(-1.27,3.81) 8(-3.81,3.81)
DS90LV049
  rect 1.422x0.356 smd: 1(-2.845,2.275) 2(-2.845,1.625) 3(-2.845,0.975) 4(-2.845,0.325) 5(-2.845,-0.325) 6(-2.845,-0.975) 7(-2.845,-1.625) 8(-2.845,-2.275) 9(2.845,-2.275) 10(2.845,-1.625) 11(2.845,-0.975) 12(2.845,-0.325) 13(2.845,0.325) 14(2.845,0.975) 15(2.845,1.625) 16(2.845,2.275)
ERNI154767MALECONNECTOR
  rect 2.7x1.199 smd: 1(-0.635,2.41) 2(4.765,2.41) 3(-0.635,-51.94) 4(4.765,-51.94)
  round 1.801 hole 1.6: 5(2,2.21) 6(2,-51.74)
  rect 0.8x0.8 smd: A1(0,0) A2(0,-1.27) A3(0,-2.54) A4(0,-3.81) A5(0,-5.08) A6(0,-6.35) A7(0,-7.62) A8(0,-8.89) A9(0,-10.16) A10(0,-11.43) A11(0,-12.7) A12(0,-13.97) A13(0,-15.24) A14(0,-16.51) A15(0,-17.78) A16(0,-19.05) A17(0,-20.32) A18(0,-21.59) A19(0,-22.86) A20(0,-24.13) A21(0,-25.4) A22(0,-26.67) A23(0,-27.94) A24(0,-29.21) A25(0,-30.48) A26(0,-31.75) A27(0,-33.02) A28(0,-34.29) A29(0,-35.56) A30(0,-36.83) A31(0,-38.1) A32(0,-39.37) A33(0,-40.64) A34(0,-41.91) A35(0,-43.18) A36(0,-44.45) A37(0,-45.72) A38(0,-46.99) A39(0,-48.26) A40(0,-49.53) B1(-1.27,0) B2(-1.27,-1.27) B3(-1.27,-2.54) B4(-1.27,-3.81) B5(-1.27,-5.08) B6(-1.27,-6.35) B7(-1.27,-7.62) B8(-1.27,-8.89) B9(-1.27,-10.16) B10(-1.27,-11.43) B11(-1.27,-12.7) B12(-1.27,-13.97) B13(-1.27,-15.24) B14(-1.27,-16.51) B15(-1.27,-17.78) B16(-1.27,-19.05) B17(-1.27,-20.32) B18(-1.27,-21.59) B19(-1.27,-22.86) B20(-1.27,-24.13) B21(-1.27,-25.4) B22(-1.27,-26.67) B23(-1.27,-27.94) B24(-1.27,-29.21) B25(-1.27,-30.48) B26(-1.27,-31.75) B27(-1.27,-33.02) B28(-1.27,-34.29) B29(-1.27,-35.56) B30(-1.27,-36.83) B31(-1.27,-38.1) B32(-1.27,-39.37) B33(-1.27,-40.64) B34(-1.27,-41.91) B35(-1.27,-43.18) B36(-1.27,-44.45) B37(-1.27,-45.72) B38(-1.27,-46.99) B39(-1.27,-48.26) B40(-1.27,-49.53)
HDMR-19-02-X-TH
  rect 0.28x2.35 smd: 1(4.5,11.225) 2(4,11.225) 3(3.5,11.225) 4(3,11.225) 5(2.5,11.225) 6(2,11.225) 7(1.5,11.225) 8(1,11.225) 9(0.5,11.225) 10(0,11.225) 11(-0.5,11.225) 12(-1,11.225) 13(-1.5,11.225) 14(-2,11.225) 15(-2.5,11.225) 16(-3,11.225) 17(-3.5,11.225) 18(-4,11.225) 19(-4.5,11.225)
  oval 1.41x3.21 hole 0.9x2.7: M1(-7.25,10.465) M2(7.25,10.465)
  oval 1.41x2.61 hole 0.9x2.1: M3(-7.25,4.505) M4(7.25,4.505)
INDC2-200-M
  round 2.286 hole 1.397: 1(-2.54,0) 2(2.54,0)
JTAG-14P
  rect 1.397x1.397 hole 1.016: 1(5.131,3.226)
  round 1.397 hole 1.016: 2(5.131,5.766) 3(7.671,3.226) 4(7.671,5.766) 5(10.211,3.226) 6(10.211,5.766) 7(12.751,3.226) 8(12.751,5.766) 9(15.291,3.226) 10(15.291,5.766) 11(17.831,3.226) 12(17.831,5.766) 13(20.371,3.226) 14(20.371,5.766)
LASER22-4816-M
  round 1.016 hole 1.016 unplated: (-3.988,3.734) (-3.988,-10.516) (0.711,3.734) (0.711,-10.516) (5.69,3.734) (5.69,-10.516) (10.312,1.397) (10.312,-3.404) (10.312,-8.204)
  round 1.778 hole 1.778 unplated: (4.089,1.397) (4.089,-8.204)
  rect 2.54x0.508 smd: 1(0,0) 2(0,-0.813) 3(0,-1.6) 4(0,-2.388) 5(0,-3.2) 6(0,-3.988) 7(0,-4.801) 8(0,-5.588) 9(0,-6.401) 10(0,-7.188) 11(8.204,-6.807) 12(8.204,-5.994) 13(8.204,-5.207) 14(8.204,-4.394) 15(8.204,-3.607) 16(8.204,-2.794) 17(8.204,-2.007) 18(8.204,-1.194) 19(8.204,-0.406) 20(8.204,0.406)
  rect 2.032x2.032 hole 1.27: 23(-21.311,-10.516) 24(-11.303,-10.516) 26(-1.803,-10.516) 29(8.204,-10.516) 37(-6.807,3.734) 38(-16.307,3.734) 39(-26.289,3.734) 40(-26.391,-4.851) 41(-6.807,-7.341) 42(-6.807,-1.956)
  rect 2.032x2.032 hole 1.016: 34(3.2,3.734)
LTM4644_1
  round 0.66 smd: A1(-6.35,-3.81) A2(-6.35,-2.54) A3(-6.35,-1.27) A4(-6.35,0) A5(-6.35,1.27) A6(-6.35,2.54) A7(-6.35,3.81) B1(-5.08,-3.81) B2(-5.08,-2.54) B3(-5.08,-1.27) B4(-5.08,0) B5(-5.08,1.27) B6(-5.08,2.54) B7(-5.08,3.81) C1(-3.81,-3.81) C2(-3.81,-2.54) C3(-3.81,-1.27) C4(-3.81,0) C5(-3.81,1.27) C6(-3.81,2.54) C7(-3.81,3.81) D1(-2.54,-3.81) D2(-2.54,-2.54) D3(-2.54,-1.27) D4(-2.54,0) D5(-2.54,1.27) D6(-2.54,2.54) D7(-2.54,3.81) E1(-1.27,-3.81) E2(-1.27,-2.54) E3(-1.27,-1.27) E4(-1.27,0) E5(-1.27,1.27) E6(-1.27,2.54) E7(-1.27,3.81) F1(0,-3.81) F2(0,-2.54) F3(0,-1.27) F4(0,0) F5(0,1.27) F6(0,2.54) F7(0,3.81) G1(1.27,-3.81) G2(1.27,-2.54) G3(1.27,-1.27) G4(1.27,0) G5(1.27,1.27) G6(1.27,2.54) G7(1.27,3.81) H1(2.54,-3.81) H2(2.54,-2.54) H3(2.54,-1.27) H4(2.54,0) H5(2.54,1.27) H6(2.54,2.54) H7(2.54,3.81) J1(3.81,-3.81) J2(3.81,-2.54) J3(3.81,-1.27) J4(3.81,0) J5(3.81,1.27) J6(3.81,2.54) J7(3.81,3.81) K1(5.08,-3.81) K2(5.08,-2.54) K3(5.08,-1.27) K4(5.08,0) K5(5.08,1.27) K6(5.08,2.54) K7(5.08,3.81) L1(6.35,-3.81) L2(6.35,-2.54) L3(6.35,-1.27) L4(6.35,0) L5(6.35,1.27) L6(6.35,2.54) L7(6.35,3.81)
MICROUSBMOLEX47590_0001
  rect 0.4x1.35 smd: 1(1.3,4.125) 2(0.65,4.125) 3(0,4.125) 4(-0.65,4.125) 5(-1.3,4.125)
  oval 1.3x2 hole 0.6x1.3: S1(4.175,1.45) S2(-4.175,1.45)
  oval 0.85x1.05 hole 0.65x0.85: S3(2.225,4.45) S4(-2.225,4.45)
  rect 2.9x1.9 smd: S5(0,1.45)
N25Q128-SF
  rect 1.168x0.508 smd: 1(-1.054,9.601) 2(-1.054,8.331) 3(-1.054,7.061) 4(-1.054,5.791) 5(-1.054,4.521) 6(-1.054,3.251) 7(-1.054,1.981) 8(-1.054,0.711) 9(8.547,0.711) 10(8.547,1.981) 11(8.547,3.251) 12(8.547,4.521) 13(8.547,5.791) 14(8.547,7.061) 15(8.547,8.331) 16(8.547,9.601)
OSC4-0705
  rect 1.778x2.032 smd: 1(-2.54,-2.101) 2(2.54,-2.101) 3(2.54,2.101) 4(-2.54,2.101)
QFN65P500X500-21
  rect 1.05x0.35 smd: 1(-2.35,1.3) 2(-2.35,0.65) 3(-2.35,0) 4(-2.35,-0.65) 5(-2.35,-1.3) 11(2.35,-1.3) 12(2.35,-0.65) 13(2.35,0) 14(2.35,0.65) 15(2.35,1.3)
  rect 0.35x1.05 smd: 6(-1.3,-2.35) 7(-0.65,-2.35) 8(0,-2.35) 9(0.65,-2.35) 10(1.3,-2.35) 16(1.3,2.35) 17(0.65,2.35) 18(0,2.35) 19(-0.65,2.35) 20(-1.3,2.35)
  rect 3x3 smd: 21(0,0)
REF3025-SOT-23-3
  rect 0.61x1.067 smd: 1(0,0) 2(1.9,0) 3(0.95,2.37)
SC0402
  rect 0.635x0.508 smd: 1(-0.508,0) 2(0.508,0)
SC0603
  rect 0.813x0.889 smd: 1(-0.762,0) 2(0.762,0)
SC0805
  rect 1.016x1.143 smd: 1(-1.016,0) 2(1.016,0)
SC1206
  rect 1.397x1.651 smd: 1(-1.397,0) 2(1.397,0)
SD0805
  rect 1.016x1.27 smd: 1(-1.143,0) 2(1.143,0)
SIP-2P
  rect 1.397x1.397 hole 1.016: 1(-1.27,0)
  round 1.778 hole 1.016: 2(1.27,0)
SIP-4P-156
  rect 2.794x2.794 hole 1.778: 1(-5.944,0)
  round 2.794 hole 1.778: 2(-1.981,0) 3(1.981,0) 4(5.944,0)
SL1206
  rect 1.397x1.651 smd: 1(-1.397,0) 2(1.397,0)
SL1812
  rect 1.524x3.175 smd: 1(-2.286,0) 2(2.286,0)
SN74LVC1T45-DBV
  rect 1.05x0.6 smd: 1(-0.533,2.4) 2(-0.533,1.45) 3(-0.533,0.5) 4(2.134,0.5) 5(2.134,1.45) 6(2.134,2.4)
SOP56-25-300
  rect 0.305x1.778 smd: 1(-8.572,-4.953) 2(-7.938,-4.953) 3(-7.303,-4.953) 4(-6.668,-4.953) 5(-6.032,-4.953) 6(-5.397,-4.953) 7(-4.763,-4.953) 8(-4.128,-4.953) 9(-3.493,-4.953) 10(-2.857,-4.953) 11(-2.223,-4.953) 12(-1.587,-4.953) 13(-0.953,-4.953) 14(-0.318,-4.953) 15(0.318,-4.953) 16(0.953,-4.953) 17(1.587,-4.953) 18(2.223,-4.953) 19(2.857,-4.953) 20(3.493,-4.953) 21(4.128,-4.953) 22(4.763,-4.953) 23(5.397,-4.953) 24(6.032,-4.953) 25(6.668,-4.953) 26(7.303,-4.953) 27(7.938,-4.953) 28(8.572,-4.953) 29(8.572,4.953) 30(7.938,4.953) 31(7.303,4.953) 32(6.668,4.953) 33(6.032,4.953) 34(5.397,4.953) 35(4.763,4.953) 36(4.128,4.953) 37(3.493,4.953) 38(2.857,4.953) 39(2.223,4.953) 40(1.587,4.953) 41(0.953,4.953) 42(0.318,4.953) 43(-0.318,4.953) 44(-0.953,4.953) 45(-1.587,4.953) 46(-2.223,4.953) 47(-2.857,4.953) 48(-3.493,4.953) 49(-4.128,4.953) 50(-4.763,4.953) 51(-5.397,4.953) 52(-6.032,4.953) 53(-6.668,4.953) 54(-7.303,4.953) 55(-7.938,4.953) 56(-8.572,4.953)
SR0402
  rect 0.635x0.508 smd: 1(-0.508,0) 2(0.508,0)
SR0603
  rect 0.762x0.813 smd: 1(-0.762,0) 2(0.762,0)
STC3528
  rect 2.032x2.286 smd: 1(-1.651,0) 2(1.651,0)
STC7343
  rect 3.302x2.413 smd: 1(-3.175,0) 2(3.175,0)
TP_40MIL
  round 1.397 hole 1.016: 1(0,0)
TPS3820-33-SOT23
  rect 0.61x1.067 smd: 1(0.498,-0.559) 2(1.448,-0.559) 3(2.398,-0.559) 4(2.398,2.159) 5(0.498,2.159)
TPS386000-VQFN
  rect 1x0.28 smd: 1(0.1,3) 2(0.1,2.5) 3(0.1,2) 4(0.1,1.5) 5(0.1,1) 11(3.9,1) 12(3.9,1.5) 13(3.9,2) 14(3.9,2.5) 15(3.9,3)
  rect 0.28x1 smd: 6(1,0.1) 7(1.5,0.1) 8(2,0.1) 9(2.5,0.1) 10(3,0.1) 16(3,3.9) 17(2.5,3.9) 18(2,3.9) 19(1.5,3.9) 20(1,3.9)
  rect 2.15x2.15 smd: 21(2,2)
USB3320_QFN32
  rect 0.864x0.254 smd: 1(-2.451,1.75) 2(-2.451,1.25) 3(-2.451,0.749) 4(-2.451,0.249) 5(-2.451,-0.249) 6(-2.451,-0.749) 7(-2.451,-1.25) 8(-2.451,-1.75) 17(2.451,-1.75) 18(2.451,-1.25) 19(2.451,-0.749) 20(2.451,-0.249) 21(2.451,0.249) 22(2.451,0.749) 23(2.451,1.25) 24(2.451,1.75)
  rect 0.254x0.864 smd: 9(-1.75,-2.451) 10(-1.25,-2.451) 11(-0.749,-2.451) 12(-0.249,-2.451) 13(0.249,-2.451) 14(0.749,-2.451) 15(1.25,-2.451) 16(1.75,-2.451) 25(1.75,2.451) 26(1.25,2.451) 27(0.749,2.451) 28(0.249,2.451) 29(-0.249,2.451) 30(-0.749,2.451) 31(-1.25,2.451) 32(-1.75,2.451)
  rect 3.302x3.302 smd: 33(0,0)
USB_TYPEC_PLUG_V1
  rect 1x2.1 hole 0.6x1.6 unplated: (-4.32,0.89) (4.32,0.89)
  rect 1.1x2.6 hole 0.6x2.1 unplated: (-4.32,-4.47) (4.32,-4.47)
  rect 0.33x0.838 smd: 1(-3,1.27) 2(-2.5,1.27) 3(-2,1.27) 4(-1.5,1.27) 5(-1,1.27) 6(-0.5,1.27) 7(0.5,1.27) 8(1,1.27) 9(1.5,1.27) 10(2,1.27) 11(2.5,1.27) 12(3,1.27) 14(2.25,0) 15(1.75,0) 16(1.25,0) 17(0.75,0) 18(0.25,0) 19(-0.25,0) 20(-0.75,0) 21(-1.25,0) 22(-1.75,0) 23(-2.25,0)
  rect 1x0.7 smd: 13(3.1,0) 24(-3.1,0)
XO75L
  rect 1.6x1.499 smd: 1(-2.54,-1.956) 2(0,-1.956) 3(2.54,-1.956) 4(2.54,1.956) 5(0,1.956) 6(-2.54,1.956)
XTAL2-200A
  round 1.27 hole 0.813: 1(-2.54,0) 2(2.54,0)

## Nets
2.5V_REF: C127.1 R68.1 U14.2(OUT)
+5VIN: C131.1 C133.1 J13.2 J13.3 L2.1 L3.1 R77.2
GND: BT1.1 BT2.2 BT3.2 C1.1 C2.2 C3.1 C4.1 C5.1 C6.1 C7.2 C8.2 C9.2 C10.2 C11.2 C12.2 C13.2 C14.2 C15.2 C16.2 C17.2 C18.2 C19.2 C20.2 C21.2 C22.2 C23.2 C24.2 C25.2 C26.2 C27.2 C28.2 C29.2 C30.2 C31.2 C32.2 C33.2 C34.2 C35.2 C36.2 C37.2 C38.2 C39.2 C40.2 C41.2 C42.2 C43.2 C44.2 C45.2 C46.2 C47.2 C48.2 C49.2 C50.2 C51.2 C52.2 C53.2 C54.2 C55.2 C56.2 C57.2 C58.2 C59.2 C60.2 C61.2 C62.2 C63.2 C64.1 C65.1 C68.2 C69.2 C70.2 C71.2 C72.2 C73.2 C74.2 C75.2 C76.2 C77.2 C78.2 C79.2 C80.2 C81.2 C82.2 C83.2 C84.2 C85.2 C86.2 C87.2 C88.2 C89.2 C90.2 C91.2 C92.2 C93.2 C94.2 C95.2 C96.2 C97.2 C98.2 C99.2 C100.2 C101.2 C102.2 C103.2 C104.2 C105.2 C106.2 C107.2 C108.2 C109.2 C110.2 C111.2 C112.2 C113.2 C114.2 C115.2 C116.2 C117.2 C118.2 C119.1 C122.1 C123.2 C125.2 C126.2 C127.2 C128.2 C129.2 C130.2 C131.2 C132.2 C133.2 C134.2 C135.2 C136.2 C137.2 C138.2 C139.2 C140.2 C141.2 C142.2 C143.2 C144.2 C145.2 C146.2 C147.2 C148.2 C149.2 C150.2 C152.2 C153.2 C155.2 C156.2 C158.2 C159.2 C161.2 C162.2 C163.2 C164.2 C165.2 C166.2 C167.2 C168.2 C169.2 C170.2 C171.2 C172.2 C173.2 C174.2 C175.2 C176.2 C177.2 C178.2 C179.2 C180.2 C181.2 C182.2 C183.2 C184.2 C185.2 C186.2 C187.2 C188.2 C189.1 C190.2 C191.2 C192.1 C193.2 C194.2 C195.2 C196.2 C197.2 C198.2 C199.2 C200.2 C201.2 C202.2 C203.1 C204.1 C205.1 C206.2 C207.1 C208.1 C209.1 C210.1 C211.1 C212.1 C214.1 C215.1 C216.1 C217.1 C220.1 D11.1(CATHODE) D12.1(CATHODE) D13.2(CATHODE) D14.2(CATHODE) D15.1(ANODE) D16.1(ANODE) D17.1(ANODE) D18.1(ANODE) D19.1(ANODE) D20.1(ANODE) D27.2(CATHODE) J1.2 J1.3 J1.4 J1.5 J2.2 J2.3 J2.4 J2.5 J3.2 J3.3 J3.4 J3.5 J4.2 J4.3 J4.4 J4.5 J5.2 J5.3 J5.4 J5.5 J6.2 J6.3 J6.4 J6.5 J7.2 J7.3 J7.4 J7.5 J8.1(G1) J8.3(G2) J8.5(G3) J8.7(G4) J8.9(G5) J8.11(G6) J8.13(G7) J9.2(GND2) J9.8(GND0) J9.11(GND_CLK) J9.17(GND) J10.1(GND#1) J10.2(GND#2) J10.3(GND#3) J10.4(GND#4) J10.5(GND#5) J10.6(GND#6) J10.A2 J10.A4 J10.A6 J10.A8 J10.A10 J10.A12 J10.A14 J10.A16 J10.A18 J10.A20 J10.A22 J10.A24 J10.A26 J10.A28 J10.A30 J10.A32 J10.A34 J10.A36 J10.A38 J10.A40 J10.B1 J10.B3 J10.B5 J10.B7 J10.B9 J10.B11 J10.B13 J10.B15 J10.B17 J10.B19 J10.B21 J10.B23 J10.B25 J10.B27 J10.B29 J10.B31 J10.B33 J10.B35 J10.B37 J10.B39 J11.1(GND#1) J11.2(GND#2) J11.3(GND#3) J11.4(GND#4) J11.5(GND#5) J11.6(GND#6) J11.A1 J11.A2 J11.A5 J11.A6 J11.A9 J11.A10 J11.A12 J11.A14 J11.A16 J11.A18 J11.A20 J11.A22 J11.A25 J11.A28 J11.A30 J11.A32 J11.A34 J11.A36 J11.A38 J11.A40 J11.B3 J11.B4 J11.B7 J11.B8 J11.B11 J11.B13 J11.B15 J11.B17 J11.B19 J11.B21 J11.B23 J11.B24 J11.B27 J11.B28 J11.B29 J11.B31 J11.B33 J11.B35 J11.B37 J11.B39 J12.1(GND#1) J12.2(GND#2) J12.3(GND#3) J12.4(GND#4) J12.5(GND#5) J12.6(GND#6) J12.A2 J12.A4 J12.A6 J12.A8 J12.A10 J12.A12 J12.A14 J12.A16 J12.A18 J12.A20 J12.A22 J12.A24 J12.A26 J12.A28 J12.A30 J12.A32 J12.A34 J12.A36 J12.A38 J12.A40 J12.B1 J12.B3 J12.B5 J12.B7 J12.B9 J12.B11 J12.B13 J12.B15 J12.B17 J12.B19 J12.B21 J12.B23 J12.B25 J12.B27 J12.B29 J12.B31 J12.B33 J12.B35 J12.B37 J12.B39 J13.1 J13.4 JP1.2 JP2.2 JP3.2 JP4.2 JP5.2 JP6.2 JP7.1 OSC1.3(GND) R1.1 R2.1 R3.1 R4.1 R5.1 R6.1 R7.1 R8.1 R17.2 R26.2 R39.2 R49.2 R50.2 R51.2 R52.2 R53.2 R54.2 R55.2 R56.2 R69.2 R71.2 R88.2 R93.2 R94.2 R95.2 R96.2 R98.2 R114.2 R141.1 R143.1 R144.2 R148.1 R149.1 R150.1 R156.1 R159.1 U1.2(GND) U2.2(GND) U3.2(GND) U4.A2(GND#A2) U4.A3(GND#A3) U4.A5(GND#A5) U4.A7(GND#A7) U4.A9(GND#A9) U4.A10(MGTPRXN2_216) U4.A11(GND#A11) U4.A12(GND#A12) U4.A22(GND#A22) U4.AA2(GND#AA2) U4.AA12(GND#AA12) U4.AA22(GND#AA22) U4.AB9(GND#AB9) U4.AB19(GND#AB19) U4.B3(GND#B3) U4.B10(MGTPRXP2_216) U4.B12(GND#B12) U4.B19(GND#B19) U4.C3(GND#C3) U4.C6(GND#C6) U4.C9(MGTPRXN3_216) U4.C10(GND#C10) U4.C11(MGTPRXN1_216) U4.C12(GND#C12) U4.C16(GND#C16) U4.D3(GND#D3) U4.D4(GND#D4) U4.D8(GND#D8) U4.D9(MGTPRXP3_216) U4.D11(MGTPRXP1_216) U4.D12(GND#D12) U4.D13(GND#D13) U4.E4(GND#E4) U4.E5(GND#E5) U4.E7(GND#E7) U4.E9(GND#E9) U4.E11(GND#E11) U4.E12(VCCBATT_0) U4.E20(GND#E20) U4.F5(GND#F5) U4.F11(GND#F11) U4.F17(GND#F17) U4.G5(GND#G5) U4.G6(GND#G6) U4.G7(GND#G7) U4.G8(GND#G8) U4.G9(GND#G9) U4.G10(GND#G10) U4.G12(GND#G12) U4.G14(GND#G14) U4.H1(GND#H1) U4.H7(GND#H7) U4.H9(GND#H9) U4.H11(GND#H11) U4.H21(GND#H21) U4.J8(GND#J8) U4.J10(GND#J10) U4.J12(GND#J12) U4.J18(GND#J18) U4.K5(GND#K5) U4.K7(GND#K7) U4.K9(GNDADC_0) U4.K11(GND#K11) U4.K15(GND#K15) U4.L2(GND#L2) U4.L8(GND#L8) U4.L9(VREFN_0) U4.L10(VP_0) U4.L22(GND#L22) U4.M7(GND#M7) U4.M9(VN_0) U4.M10(VREFP_0) U4.M11(GND#M11) U4.M19(GND#M19) U4.N6(GND#N6) U4.N8(GND#N8) U4.N9(DXN_0) U4.N10(DXP_0) U4.N16(GND#N16) U4.P3(GND#P3) U4.P7(GND#P7) U4.P9(GND#P9) U4.P11(GND#P11) U4.P13(GND#P13) U4.R8(GND#R8) U4.R10(GND#R10) U4.R12(GND#R12) U4.R20(GND#R20) U4.T7(GND#T7) U4.T9(GND#T9) U4.T11(GND#T11) U4.T17(GND#T17) U4.U4(GND#U4) U4.U9(M2_0) U4.U10(M1_0) U4.U14(GND#U14) U4.V1(GND#V1) U4.V11(GND#V11) U4.V21(GND#V21) U4.W8(GND#W8) U4.W18(GND#W18) U4.Y5(GND#Y5) U4.Y15(GND#Y15) U5.2(GND) U6.10(VSS) U7.1(A1 GND) U7.12(A12 GND) U7.13(B1 GND) U7.24(B12 GND) U8.1(A1 GND) U8.12(A12 GND) U8.13(B1 GND) U8.24(B12 GND) U9.9(\\E\N) U9.13(GND) U10.9(\\E\N) U10.13(GND) U11.9(\\E\N) U11.13(GND) U12.9(\\E\N) U12.13(GND) U13.16(AVSS1) U13.19(REFCOM) U13.25(AVSS) U13.27(DVSS) U14.3(GND) U15.12(GND) U15.21(PAD) U16.12(GND) U16.21(PAD) U17.12(GND) U17.21(PAD) U18.A4(GND#A4) U18.A5(GND#A5) U18.B1(GND#B1) U18.B2(GND#B2) U18.C5(GND#C5) U18.D3(GND#D3) U18.D4(GND#D4) U18.D5(GND#D5) U18.E1(GND#E1) U18.E2(GND#E2) U18.F5(GND#F5) U18.G3(GND#G3) U18.G4(GND#G4) U18.G5(GND#G5) U18.H1(GND#H1) U18.H2(GND#H2) U18.J5(GND#J5) U18.K3(GND#K3) U18.K4(GND#K4) U18.L1(GND#L1) U18.L2(GND#L2) U19.1(VEET_1) U19.10(VEER_1) U19.11(VEER_2) U19.14(VEER_3) U19.17(VEET_2) U19.20(VEET_3) U19.23(GND1) U19.24(GND2) U19.26(GND4) U19.29(GND7) U19.34(GND12) U19.37(GND15) U19.38(GND16) U19.39(GND17) U19.40(GND18) U19.41(GND19) U19.42(GND20) U20.1(VEET_1) U20.10(VEER_1) U20.11(VEER_2) U20.14(VEER_3) U20.17(VEET_2) U20.20(VEET_3) U20.23(GND1) U20.24(GND2) U20.26(GND4) U20.29(GND7) U20.34(GND12) U20.37(GND15) U20.38(GND16) U20.39(GND17) U20.40(GND18) U20.41(GND19) U20.42(GND20) U21.4(GND1) U21.7(GND2) U21.13(AGND1) U21.17(AGND2) U21.19(GND3) U21.33(GND4) U21.35(GND5) U21.48(GND6) U22.5(GND) U23.2(GND) U24.2(A1) U24.3(A2) U24.4(VSS) U25.8(VEE#8) U25.13(VEE#13) U25.17(VEE#17) U25.19(SADDR5) U25.23(VEE#23) U25.27(SQUELCH) U25.30(VEE#30) U25.33(EP)
GND_EARTH: R144.1 U22.S1 U22.S2 U22.S3 U22.S4 U22.S5
SGND2: C151.2 C154.2 C157.2 C160.2 R103.2 R106.2 R109.2 R112.2 R114.1 U18.F7(SGND)
VCC1.0V_DONE: R84.2 R97.2 U16.18(\\R\E\S\E\T\4)
VCC1.0VD: C80.1 C81.1 C82.1 C83.1 C84.1 C85.1 C86.1 C87.1 C88.1 C89.1 C90.1 C91.1 C92.1 C93.1 C94.1 C95.1 C105.1 C106.1 C107.1 C150.1 L4.1 R86.1 U4.H8(VCCINT#H8) U4.H10(VCCINT#H10) U4.J7(VCCINT#J7) U4.J9(VCCINT#J9) U4.J11(VCCBRAM#J11) U4.K8(VCCINT#K8) U4.L7(VCCINT#L7) U4.L11(VCCBRAM#L11) U4.M8(VCCINT#M8) U4.N7(VCCINT#N7) U4.N11(VCCBRAM#N11) U4.P8(VCCINT#P8) U4.P10(VCCINT#P10) U4.R7(VCCINT#R7) U4.R9(VCCINT#R9) U4.T8(VCCINT#T8) U4.T10(VCCINT#T10)
VCC1.8V_DONE: R81.2 R99.2 U16.17(\\R\E\S\E\T\3)
VCC1.8VD: C96.1 C97.1 C98.1 C99.1 C100.1 C101.1 C102.1 C103.1 C104.1 C135.1 C141.1 C153.1 L1.1 L5.1 R85.1 R87.1 R91.1 U4.H12(VCCAUX#H12) U4.K12(VCCAUX#K12) U4.M12(VCCAUX#M12) U4.P12(VCCAUX#P12) U4.R11(VCCAUX#R11) U15.5(IN1) U15.6(IN2) U15.7(IN3) U15.8(IN4) U15.11(EN) U17.5(IN1) U17.6(IN2) U17.7(IN3) U17.8(IN4)
VCC1.8VDEN: R97.1 R107.2 U18.F6(RUN2)
VCC2.5VD: C24.1 C25.1 C26.1 C27.1 C28.1 C29.1 C30.1 C31.1 C32.1 C63.1 C64.2 C65.2 C159.1 L7.1 OSC1.1(\\S\T/OE) OSC1.6(VDD) R154.1 R157.1 U4.G19(VCCO_15_1) U4.H16(VCCO_15_2) U4.J13(VCCO_15_3) U4.K20(VCCO_15_4) U4.L17(VCCO_15_5) U4.N21(VCCO_15_6)
VCC3.3VD: C2.1 C4.2 C6.2 C7.1 C8.1 C9.1 C10.1 C11.1 C12.1 C13.1 C14.1 C15.1 C16.1 C17.1 C18.1 C19.1 C20.1 C21.1 C22.1 C23.1 C33.1 C34.1 C35.1 C36.1 C37.1 C38.1 C39.1 C40.1 C41.1 C42.1 C43.1 C44.1 C45.1 C46.1 C47.1 C48.1 C49.1 C50.1 C51.1 C52.1 C53.1 C54.1 C55.1 C56.1 C57.1 C58.1 C59.1 C60.1 C61.1 C62.1 C68.1 C69.1 C71.1 C73.1 C108.1 C109.1 C110.1 C111.1 C112.1 C113.1 C117.1 C128.1 C139.1 C148.1 C156.1 C165.1 C169.1 C170.1 C171.1 C172.1 C173.1 C177.1 C178.1 C179.1 C183.1 C184.1 C187.1 C190.1 C191.1 C192.2 C193.1 C194.1 C195.1 C196.1 C197.1 C198.1 C199.1 C200.1 C201.1 C202.1 C205.2 C206.1 C207.2 C208.2 C209.2 C210.2 C211.2 C212.2 C214.2 C215.2 C216.2 C217.2 D28.1(ANODE) J8.2(VREF) L6.1 L8.1 L9.1 L10.1 L11.1 R10.1 R14.2 R23.2 R28.2 R29.2 R30.2 R35.1 R36.1 R37.2 R38.2 R41.1 R42.1 R43.1 R44.1 R45.1 R46.1 R47.1 R48.1 R80.1 R82.1 R89.2 R101.2 R119.2 R120.2 R121.2 R122.2 R123.2 R124.2 R125.2 R126.2 R127.2 R128.2 R129.2 R130.2 R131.2 R132.2 R133.2 R134.2 R135.2 R136.2 R137.2 R138.2 R139.2 R140.2 R145.2 R146.2 R147.2 R152.1 R153.1 U1.6(VCCB) U2.6(VCCB) U3.6(VCCB) U4.A17(VCCO_16_1) U4.AA7(VCCO_34_1) U4.AA17(VCCO_13_1) U4.AB4(VCCO_34_2) U4.AB14(VCCO_13_2) U4.B14(VCCO_16_2) U4.C1(VCCO_35_1) U4.C21(VCCO_16_3) U4.D18(VCCO_16_4) U4.E15(VCCO_16_5) U4.F2(VCCO_35_2) U4.F12(VCCO_0_1) U4.F22(VCCO_16_6) U4.H6(VCCO_35_3) U4.J3(VCCO_35_4) U4.M4(VCCO_35_5) U4.M14(VCCO_14_1) U4.N1(VCCO_35_6) U4.P18(VCCO_14_2) U4.R5(VCCO_34_3) U4.R15(VCCO_14_3) U4.T2(VCCO_34_4) U4.T12(VCCO_0_2) U4.T22(VCCO_14_4) U4.U8(CFGBVS_0) U4.U11(M0_0) U4.U19(VCCO_14_5) U4.V6(VCCO_34_5) U4.V16(VCCO_13_3) U4.W3(VCCO_34_6) U4.W13(VCCO_13_4) U4.Y10(VCCO_13_5) U4.Y20(VCCO_14_6) U5.4(VCC) U6.2(VCC) U9.12(VDD) U9.16(EN) U10.12(VDD) U10.16(EN) U11.12(VDD) U11.16(EN) U12.12(VDD) U12.16(EN) U13.28(DVDD) U14.1(IN) U15.10(BIAS) U17.10(BIAS) U21.6(VCC1) U21.10(AVCC1) U21.14(AVCC2) U21.18(VCC2) U21.24(VCC3) U21.34(VCC4) U21.39(VCC5) U21.50(VCC6) U23.5(VDD) U24.8(VCC) U25.1(VCC#1) U25.2(VCC#2) U25.10(REFCLKP) U25.12(VCC#12) U25.18(VCC#18) U25.24(VCC#24) U25.31(VCC#31) U25.32(VCC#32)
VCC5.0V: C114.1 C115.1 C116.1 C132.1 C134.1 C136.1 C137.1 C161.1 C162.1 C163.1 C164.1 L3.2 R9.2 R13.1 R22.1 R64.1 R66.1 R78.2 R81.1 R84.1 R104.1 R107.1 R110.1 R115.1 R116.1 R117.1 R118.1 U13.15(AVDD1) U13.26(AVDD) U16.14(VDD) U18.B3(VIN1#B3) U18.B4(VIN1#B4) U18.B5(SVIN1) U18.E3(VIN2#E3) U18.E4(VIN2#E4) U18.E5(SVIN2) U18.H3(VIN3#H3) U18.H4(VIN3#H4) U18.H5(SVIN3) U18.L3(VIN4#L3) U18.L4(VIN4#L4) U18.L5(SVIN4)
VCC5.0V_CON_IN: C129.1 C130.1 J10.B28 J10.B30 J11.A37 J11.A39 J11.B38 J11.B40 J12.B28 J12.B30 L2.2
VCCADC: C70.1 C72.1 L1.2 U4.K10(VCCADC_0)
VCCIOEN: R99.1 R110.2 U18.J6(RUN3) U18.K7(RUN4)
A0: JP7.2 R145.1 U24.1(A0)
ADC_CLK: U4.AB11(IO_L7P_T1_13) U13.1(CLK)
ADC_DATA0: U4.AA11(IO_L9N_T1_DQS_13) U13.2(BIT12(LSB))
ADC_DATA1: U4.AB10(IO_L8N_T1_13) U13.3(BIT11)
ADC_DATA2: U4.AA10(IO_L9P_T1_DQS_13) U13.4(BIT10)
ADC_DATA3: U4.AA9(IO_L8P_T1_13) U13.5(BIT9)
ADC_DATA4: U4.AB8(IO_L22N_T3_34) U13.6(BIT8)
